# EAGLE board vaayu_2x8 (EAGLE 6.6.0)
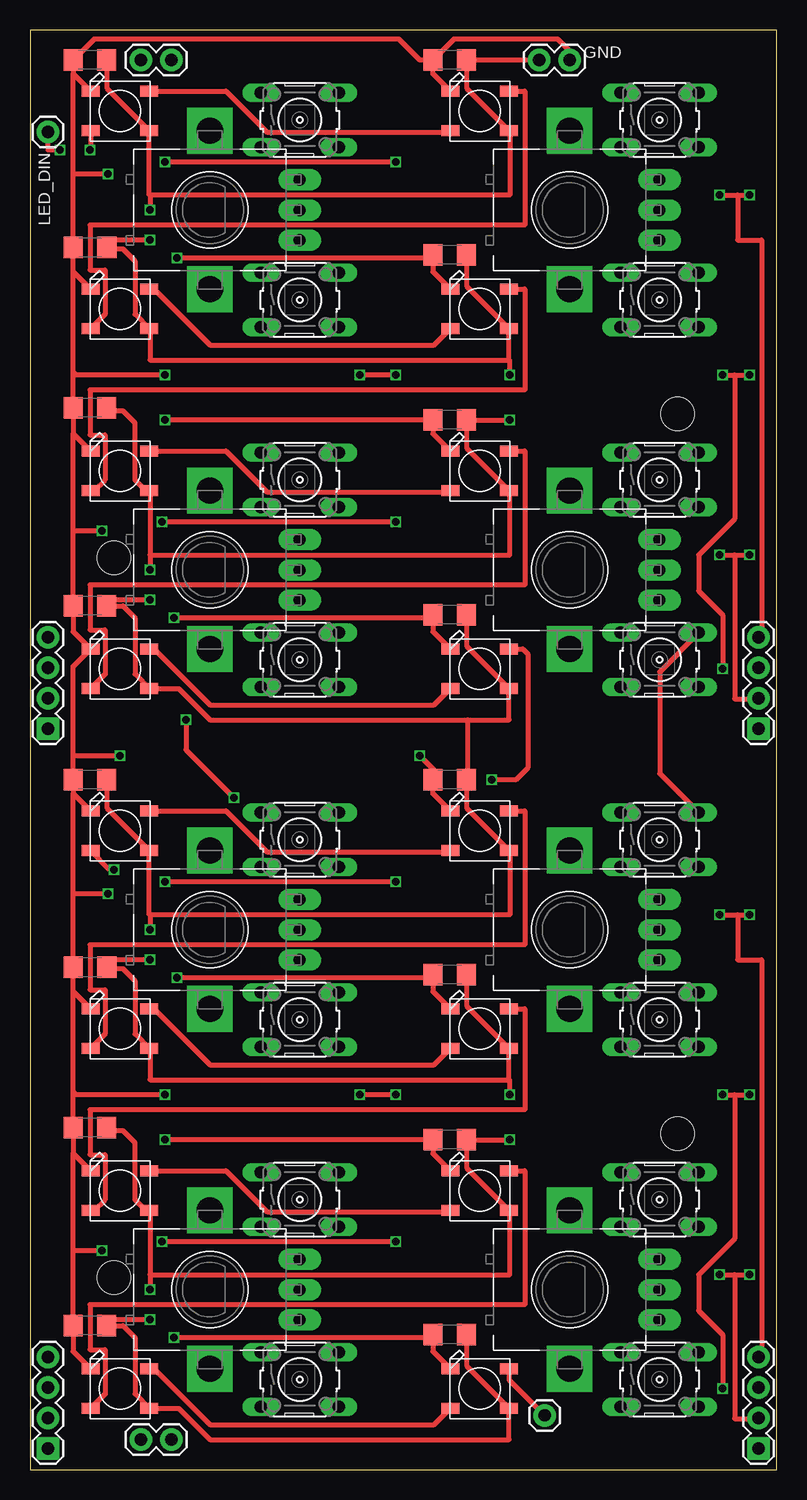
[diagram p0: board, top side]
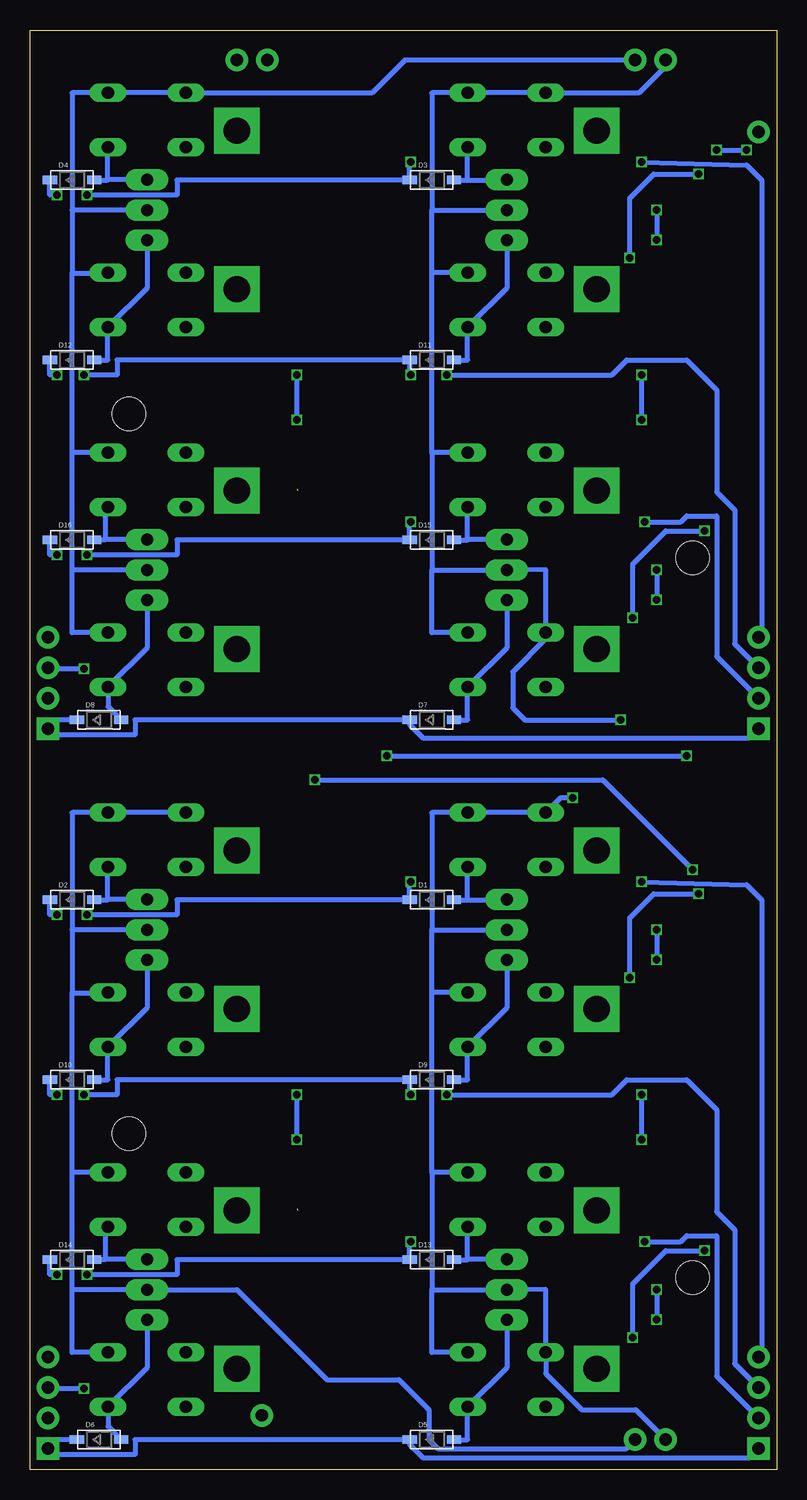
[diagram p1: board, bottom side, seen from below]

Size 62.25 x 120 mm. Coordinates in mm from the lower left corner, seen from the top.
Outline: 0,0 62.25,0 62.25,60 62.25,120 0,120 0,60 0,0
Copper layers (1*16): Top 0.035mm / dielectric 1.5mm / Bottom 0.035mm
Design rules "dirt_cheap_dirty_boards.v1": minimum track width 5mil, minimum drill 12mil, track to track 5mil, track to pad 5mil, pad to pad 5mil, via to via 5mil, smd to smd 0mil, copper to edge 10mil, drill to drill 10mil, minimum pad ring 10mil, minimum via ring 6mil, stop-mask expansion 2mil, vias tented up to drill 25mil, thermal gap 10mil
Holes 2.8 mm at 7,76 7,16 54,28 54,88

## Footprints (pad centres in the part's own frame; a part is rotated, then mirrored left to right if it is on the bottom)
C1206 = smd 1.6 x 1.8: 1 -1.4,0; 2 1.4,0
SOD-123 = smd 1.2 x 0.7: A 1.85,0; C -1.85,0
1X02 = drill 1.016 pad 1.88: 1 0,0; 2 2.54,0
1X04 = drill 1.016 pad 1.88 square: 1 0,0 | drill 1.016 pad 1.88: 2 2.54,0; 3 5.08,0; 4 7.62,0
1X01 = drill 1.016 pad 1.88: 1 0,0
WS2812B = smd 1.5 x 0.9: 1-VDD 2.45,-1.65; 2-DOUT 2.45,1.65; 3-GND -2.45,1.65; 4-DIN -2.45,-1.65
B3F-10XX = drill 1.016 long: 1 -3.251,2.261; 2 3.251,2.261; 3 -3.251,-2.261; 4 3.251,-2.261
TW-700198 = drill 2.2 pad 3.81 square: NC1 0,6.604; NC2 0,-6.604 | drill 1 pad 1.778 long: P1 7.493,2.54; P2 7.493,0; P3 7.493,-2.54

## Placement (x,y rotation side)
C1  [C1206]  35,41.25 180 top
C2  [C1206]  5.01,41.86 180 top
C3  [C1206]  5,117.5 180 top
C4  [C1206]  35,71.25 180 top
C5  [C1206]  5,12 180 top
C6  [C1206]  5,28.5 180 top
C7  [C1206]  35,101.25 180 top
C8  [C1206]  5.01,101.86 180 top
C9  [C1206]  5,57.5 180 top
C10  [C1206]  35,11.25 180 top
C11  [C1206]  5,72 180 top
C12  [C1206]  5,88.5 180 top
C13  [C1206]  35,27.5 180 top
C14  [C1206]  35,57.5 180 top
C15  [C1206]  35,87.5 180 top
C16  [C1206]  35,117.5 180 top
D1  [SOD-123]  28.75,47.5 0 bottom
D2  [SOD-123]  58.75,47.5 0 bottom
D3  [SOD-123]  28.75,107.5 0 bottom
D4  [SOD-123]  58.75,107.5 0 bottom
D5  [SOD-123]  28.75,2.5 0 bottom
D6  [SOD-123]  56.5,2.5 0 bottom
D7  [SOD-123]  28.75,62.5 0 bottom
D8  [SOD-123]  56.5,62.5 0 bottom
D9  [SOD-123]  28.75,32.5 0 bottom
D10  [SOD-123]  58.75,32.5 0 bottom
D11  [SOD-123]  28.75,92.5 0 bottom
D12  [SOD-123]  58.75,92.5 0 bottom
D13  [SOD-123]  28.75,17.5 0 bottom
D14  [SOD-123]  58.75,17.5 0 bottom
D15  [SOD-123]  28.75,77.5 0 bottom
D16  [SOD-123]  58.75,77.5 0 bottom
GND  M02PTH  [1X02]  45,117.5 180 top
JP2  [1X04]  1.5,1.75 90 top
JP3  [1X04]  60.75,1.75 90 top
JP4  M01PTH  [1X01]  42.91,4.51 0 top
JP5  [1X04]  1.5,61.75 90 top
JP6  M02PTH  [1X02]  9.25,2.5 0 top
JP7  M02PTH  [1X02]  9.25,117.5 0 top
JP9  [1X04]  60.75,61.75 90 top
L1  WS2812B  [WS2812B]  7.5,36.75 0 top
L2  WS2812B  [WS2812B]  37.5,36.75 0 top
L3  WS2812B  [WS2812B]  7.5,113.25 0 top
L4  WS2812B  [WS2812B]  37.5,113.25 0 top
L5  WS2812B  [WS2812B]  7.5,23.25 0 top
L6  WS2812B  [WS2812B]  37.5,23.25 0 top
L7  WS2812B  [WS2812B]  7.5,96.75 0 top
L8  WS2812B  [WS2812B]  37.5,96.75 0 top
L9  WS2812B  [WS2812B]  7.5,53.25 0 top
L10  WS2812B  [WS2812B]  37.5,53.25 0 top
L11  WS2812B  [WS2812B]  7.5,83.25 0 top
L12  WS2812B  [WS2812B]  37.5,83.25 0 top
L13  WS2812B  [WS2812B]  7.5,6.75 0 top
L14  WS2812B  [WS2812B]  37.5,6.75 0 top
L15  WS2812B  [WS2812B]  7.5,66.75 0 top
L16  WS2812B  [WS2812B]  37.5,66.75 0 top
LED_DIN  M01PTH  [1X01]  1.5,111.5 0 top
S1  [B3F-10XX]  22.5,52.5 0 top
S2  [B3F-10XX]  52.5,52.5 0 top
S3  [B3F-10XX]  22.5,112.5 0 top
S4  [B3F-10XX]  52.5,112.5 0 top
S5  [B3F-10XX]  22.5,37.5 0 top
S6  [B3F-10XX]  52.5,37.5 0 top
S7  [B3F-10XX]  22.5,97.5 0 top
S8  [B3F-10XX]  52.5,97.5 0 top
S9  [B3F-10XX]  22.5,7.5 0 top
S10  [B3F-10XX]  52.5,7.5 0 top
S11  [B3F-10XX]  22.5,67.5 0 top
S12  [B3F-10XX]  52.5,67.5 0 top
S13  [B3F-10XX]  22.5,22.5 0 top
S14  [B3F-10XX]  52.5,22.5 0 top
S15  [B3F-10XX]  22.5,82.5 0 top
S16  [B3F-10XX]  52.5,82.5 0 top
U$1  ALPHA-ROT-ENCODER  [TW-700198]  45,45 0 top
U$2  ALPHA-ROT-ENCODER  [TW-700198]  45,105 0 top
U$3  ALPHA-ROT-ENCODER  [TW-700198]  15,105 0 top
U$4  ALPHA-ROT-ENCODER  [TW-700198]  15,45 0 top
U$5  ALPHA-ROT-ENCODER  [TW-700198]  45,15 0 top
U$6  ALPHA-ROT-ENCODER  [TW-700198]  45,75 0 top
U$7  ALPHA-ROT-ENCODER  [TW-700198]  15,75 0 top
U$8  ALPHA-ROT-ENCODER  [TW-700198]  15,15 0 top

## Library data of the parts
C1-C16 = resistor
D1-D16 L1-L16 = adafruit
GND JP2-JP7 JP9 LED_DIN = SparkFun-Connectors
S1-S16 = switch-omron; MPN: B3F-1000; OC_FARNELL: 176432; OC_NEWARK: 36M3542
U$1-U$8 = RotaryEncoder

## Nets
COL1: JP6.1 JP7.1 S1.1 S1.2 S3.1 S3.2 S5.2 S7.2 S9.1 S9.2 S11.1 S11.2 S13.2 S15.2 U$3.P2 U$4.P2 U$7.P2 U$8.P2
COL2: JP6.2 JP7.2 S2.1 S2.2 S4.1 S4.2 S6.2 S8.2 S10.2 S12.2 S14.2 S16.2 U$1.P2 U$2.P2 U$5.P2 U$6.P2
D1: D4.A S4.4 U$2.P1
D2: D7.A S11.4 U$7.P3
D3: D8.A S12.4 U$6.P3
D4: D11.A S7.4 U$3.P3
D5: D12.A S8.4 U$2.P3
D6: D15.A S15.4 U$7.P1
D7: D16.A S16.4 U$6.P1
D8: D3.A S3.4 U$3.P1
D11: D1.A S1.4 U$4.P1
D12: D9.A S5.4 U$4.P3
D13: D5.A S9.4 U$8.P3
D14: D13.A S13.4 U$8.P1
D21: D2.A S2.4 U$1.P1
D22: D10.A S6.4 U$1.P3
D23: D6.A S10.4 U$5.P3
D24: D14.A S14.4 U$5.P1
GND: C1.2 C2.2 C3.2 C4.2 C5.2 C6.2 C7.2 C8.2 C9.2 C10.2 C11.2 C12.2 C13.2 C14.2 C15.2 C16.2 GND.1 L1.3-GND L2.3-GND L3.3-GND L4.3-GND L5.3-GND L6.3-GND L7.3-GND L8.3-GND L9.3-GND L10.3-GND L11.3-GND L12.3-GND L13.3-GND L14.3-GND L15.3-GND L16.3-GND
LED_DIN1: L3.4-DIN LED_DIN.1
N$1: L1.2-DOUT L2.4-DIN
N$2: L3.2-DOUT L4.4-DIN
N$3: L4.2-DOUT L7.4-DIN
N$4: L2.2-DOUT L5.4-DIN
N$5: L5.2-DOUT L6.4-DIN
N$6: L6.2-DOUT L13.4-DIN
N$7: L7.2-DOUT L8.4-DIN
N$8: L8.2-DOUT L11.4-DIN
N$9: L13.2-DOUT L14.4-DIN
N$10: JP4.1 L14.2-DOUT
N$11: L11.2-DOUT L12.4-DIN
N$12: L12.2-DOUT L15.4-DIN
N$13: L15.2-DOUT L16.4-DIN
N$14: L9.4-DIN L16.2-DOUT
N$23: L9.2-DOUT L10.4-DIN
N$24: L1.4-DIN L10.2-DOUT
ROW1: D1.C D2.C JP2.4 JP3.4
ROW2: D9.C D10.C JP2.3 JP3.3
ROW3: D13.C D14.C JP2.2 JP3.2
ROW4: D5.C D6.C JP2.1 JP3.1
ROW5: D3.C D4.C JP5.4 JP9.4
ROW6: D15.C D16.C JP5.2 JP9.2
ROW7: D11.C D12.C JP5.3 JP9.3
ROW8: D7.C D8.C JP5.1 JP9.1
VCC: C1.1 C2.1 C3.1 C4.1 C5.1 C6.1 C7.1 C8.1 C9.1 C10.1 C11.1 C12.1 C13.1 C14.1 C15.1 C16.1 GND.2 L1.1-VDD L2.1-VDD L3.1-VDD L4.1-VDD L5.1-VDD L6.1-VDD L7.1-VDD L8.1-VDD L9.1-VDD L10.1-VDD L11.1-VDD L12.1-VDD L13.1-VDD L14.1-VDD L15.1-VDD L16.1-VDD

## Tracks (layer width: path | path; a pad name or v marks a point on that pad's centre or on a via)
COL1  (via drill 0.6)
  Top 0.406: v13,62.5 13,60 v17,56
  Bottom 0.406: 28.75,45 28.75,54.76 S1.2 S1.1 18.01,56 v17,56 | 28.75,45 U$4.P2 | S5.2 28.75,39.76 | 28.75,39.76 28.75,45 | 28.75,24.76 28.75,15 | 28.75,15 U$8.P2 19.25,15.01 S9.1 19.25,8 16.25,5 11.75,5 JP6.1 | S9.2 28.75,9.76 28.75,15 | S13.2 28.75,24.76 | 28.75,24.76 28.75,39.76 | 28.75,105 28.75,114.76 S3.2 S3.1 19.24,114.75 11.5,114.75 9.25,117 JP7.1 | 28.75,105 U$3.P2 | S7.2 28.75,99.76 | 28.75,99.76 28.75,105 | 28.75,84.76 28.75,75 | 28.75,75 U$7.P2 19.25,75.01 S11.1 19.25,69.25 22,66.5 22,63.5 21,62.5 v13,62.5 | S11.2 28.75,69.76 28.75,75 | S15.2 28.75,84.76 | 28.75,84.76 28.75,99.76
COL2
  Top 0.406: S12.2 52.5,66.5 52.5,58.01 S2.2
  Bottom 0.406: 58.75,45 58.75,54.76 S2.2 S2.1 | 58.75,45 58.75,39.75 | 58.75,39.75 S6.2 | U$1.P2 58.75,45 | S14.2 58.75,24.76 | 58.75,24.76 58.75,39.75 | 58.75,15 U$5.P2 45,15 37.5,7.5 31.5,7.5 29,5 29,2.5 28.25,1.75 12.54,1.75 JP6.2 | 58.75,15 58.75,24.76 | S10.2 58.75,9.76 58.75,15 | 58.75,105 58.75,114.76 S4.2 S4.1 49.24,114.75 33.75,114.75 31,117.5 JP7.2 | 58.75,105 58.75,99.75 | 58.75,99.75 S8.2 | U$2.P2 58.75,105 | S16.2 58.75,84.76 | 58.75,84.76 58.75,99.75 | U$6.P2 58.75,75 | 58.75,75 58.75,84.76 | S12.2 58.75,69.76 58.75,75
D1
  Bottom 0.406: D4.A 55.75,107.5 55.75,107.54 | 55.75,107.54 S4.4 | U$2.P1 55.75,107.54
D2
  Bottom 0.406: D7.A 25.75,62.5 S11.4 22.49,68.5 U$7.P3
D3
  Bottom 0.406: U$6.P3 52.49,68.5 S12.4 55.75,63.6 D8.A
D4
  Bottom 0.406: D11.A 25.75,92.5 S7.4 22.49,98.5 U$3.P3
D5
  Bottom 0.406: D12.A 55.75,92.5 S8.4 52.49,98.5 U$2.P3
D6
  Bottom 0.406: U$7.P1 25.75,77.54 | 25.75,77.54 S15.4 | D15.A 25.75,77.5 25.75,77.54
D7
  Bottom 0.406: S16.4 56,80.24 56,77.54 | D16.A 56,77.5 56,77.54 | U$6.P1 56,77.54
D8
  Bottom 0.406: D3.A 25.75,107.5 | 25.75,107.5 S3.4 | 25.75,107.5 22.53,107.5 U$3.P1
D11
  Bottom 0.406: D1.A 25.75,47.5 | 25.75,47.5 S1.4 | 25.75,47.5 22.53,47.5 U$4.P1
D12
  Bottom 0.406: D9.A 25.75,32.5 S5.4 22.49,38.5 U$4.P3
D13
  Bottom 0.406: D5.A 25.75,2.5 S9.4 22.49,8.5 U$8.P3
D14
  Bottom 0.406: U$8.P1 25.75,17.54 | 25.75,17.54 S13.4 | D13.A 25.75,17.5 25.75,17.54
D21
  Bottom 0.406: D2.A 55.75,47.5 55.75,47.54 | 55.75,47.54 S2.4 | U$1.P1 55.75,47.54
D22
  Bottom 0.406: D10.A 55.75,32.5 S6.4 52.49,38.5 U$1.P3
D23
  Bottom 0.406: U$5.P3 52.49,8.5 S10.4 55.75,3.6 D6.A
D24
  Bottom 0.406: S14.4 56,20.24 56,17.54 | D14.A 56,17.5 56,17.54 | U$5.P1 56,17.54
GND  (via drill 0.6)
  Top 0.406: 33.6,57.35 C14.2 33.75,57.5 | 3.6,39.85 L1.3-GND | L2.3-GND 33.6,39.85 C1.2 33.6,41.1 33.5,41 v12.25,41 | 3.6,56.35 C9.2 3.6,59.5 | 3.6,56.35 L9.3-GND | L10.3-GND 33.6,56.35 33.6,57.35 | 3.6,39.85 3.6,41.84 C2.2 3.6,48 | 3.6,26.35 C6.2 3.6,31.5 | 3.6,26.35 L5.3-GND | L6.3-GND 33.6,26.35 C13.2 v11.25,27.5 | L13.3-GND 3.6,9.85 C5.2 3.6,18.25 | L14.3-GND 33.6,9.85 C10.2 33.6,11.1 33.5,11 v12,11 | 33.6,57.35 33.75,57.5 | 3.6,18.25 3.6,26.35 | 3.6,31.5 3.6,39.85 | 3.6,48 3.6,56.35 | v11.25,31.25 3.85,31.25 3.6,31.5 | v6,18.25 3.6,18.25 | v6.5,48 3.6,48 | C16.2 33.6,117.35 | 3.6,99.85 L7.3-GND | L8.3-GND 33.6,99.85 C7.2 33.6,101.1 33.5,101 v12.25,101 | 3.6,116.35 C3.2 5.35,119.25 30.75,119.25 32.5,117.5 C16.2 | 3.6,116.35 L3.3-GND | L4.3-GND 33.6,116.35 33.6,117.35 | 3.6,99.85 3.6,101.84 C8.2 3.6,108 | 3.6,86.35 C12.2 3.6,91.5 | 3.6,86.35 L11.3-GND | L12.3-GND 33.6,86.35 C15.2 v11.25,87.5 | L16.3-GND 33.6,69.85 C4.2 33.6,71.1 33.5,71 v12,71 | 33.6,117.35 33.75,117.5 C16.2 | 3.6,78.25 C11.2 3.6,69.85 L15.3-GND 3.6,66.95 3.6,59.5 | 3.6,78.25 3.6,86.35 | 3.6,91.5 3.6,99.85 | 3.6,108 3.6,116.35 | v11.25,91.25 3.85,91.25 3.6,91.5 | v6,78.25 3.6,78.25 | v6.5,108 3.6,108 | GND.1 45,118.25 44,119.25 35.35,119.25 C16.2 | 33.75,57.5 33.75,58.25 v32.5,59.5 | v7.5,59.5 3.6,59.5
  Bottom 0.406: v11.25,27.5 v11.25,31.25 | v12,11 12,15.5 9.25,18.25 v6,18.25 | v12.25,41 12.25,46 10.25,48 v6.5,48 | v11.25,87.5 v11.25,91.25 | v12,71 12,75.5 9.25,78.25 v6,78.25 | v12.25,101 12.25,106 10.25,108 v6.5,108 | v32.5,59.5 v7.5,59.5
LED_DIN1  (via drill 0.6)
  Top 0.406: L3.4-DIN 5.05,110.05 v5,110 | v2.5,110 1.5,110 LED_DIN.1
  Bottom 0.406: v5,110 v2.5,110
N$1
  Top 0.406: L1.2-DOUT 10.35,38.4 15,33.75 33.7,33.75 L2.4-DIN
N$2
  Top 0.406: L3.2-DOUT 16.35,114.9 19.75,111.5 34.95,111.5 L4.4-DIN
N$3
  Top 0.406: L4.2-DOUT 41.25,114.9 41.25,103.75 5,103.75 5,100 6.25,100 6.25,96.3 L7.4-DIN
N$4
  Top 0.406: L2.2-DOUT 41.25,38.4 41.25,30 5,30 5,26.25 6.25,26.25 6.25,22.5 5.35,21.6 L5.4-DIN
N$5
  Top 0.406: L5.2-DOUT 16.35,24.9 19.75,21.5 34.95,21.5 L6.4-DIN
N$6
  Top 0.406: L6.2-DOUT 41.25,24.9 41.25,13.75 5,13.75 5,10 6.25,10 6.25,6.25 6.2,6.25 L13.4-DIN
N$7
  Top 0.406: L7.2-DOUT 10.35,98.4 15,93.75 33.7,93.75 L8.4-DIN
N$8
  Top 0.406: L8.2-DOUT 41.25,98.4 41.25,90 5,90 5,86.25 6.25,86.25 6.25,82.5 5.35,81.6 L11.4-DIN
N$9
  Top 0.406: L13.2-DOUT 10.35,8.4 15,3.75 33.7,3.75 L14.4-DIN
N$10
  Top 0.406: L14.2-DOUT 39.95,7.47 JP4.1
N$11
  Top 0.406: L11.2-DOUT 16.35,84.9 19.75,81.5 34.95,81.5 L12.4-DIN
N$12
  Top 0.406: L12.2-DOUT 41.25,84.9 41.25,73.75 5,73.75 5,70 6.25,70 6.25,66.25 6.2,66.25 L15.4-DIN
N$13
  Top 0.406: L15.2-DOUT 10.35,68.4 15,63.75 33.7,63.75 L16.4-DIN
N$14  (via drill 0.6)
  Top 0.406: L16.2-DOUT 41.1,68.4 41.5,68 41.5,58.5 40.5,57.5 v38.5,57.5 | v7,50 6.65,50 L9.4-DIN
  Bottom 0.406: v38.5,57.5 14.5,57.5 v7,50
N$23
  Top 0.406: L9.2-DOUT 16.35,54.9 19.75,51.5 34.95,51.5 L10.4-DIN
N$24
  Top 0.406: L10.2-DOUT 41.25,54.9 41.25,43.75 5,43.75 5,40 6.25,40 6.25,36.3 L1.4-DIN
ROW1  (via drill 0.6)
  Top 0.406: v57.5,46.25 59,46.25 | 59,46.25 v60,46.25 | 59,46.25 59,42.5 61,42.5 61,9.62 JP3.4 | v30.5,49 v11.25,49
  Bottom 0.406: v57.5,46.25 50,46.25 50,47.5 D1.C 30.6,48.65 v30.5,49 | v60,46.25 60.6,46.25 D2.C | v11.25,49 2.5,48.75 1.25,47.5 1.25,9.62 JP2.4
ROW2  (via drill 0.6)
  Top 0.406: v57.75,31.25 58.75,31.25 | 58.75,31.25 v60,31.25 | 58.75,31.25 58.75,19.25 55.75,16.25 55.75,13.25 57.75,11.25 v57.75,6.75 | v30.5,31.25 v27.5,31.25
  Bottom 0.406: D10.C 60.6,31.25 v60,31.25 | v57.75,31.25 55,31.25 55,32.5 D9.C 30.6,31.35 v30.5,31.25 | v57.75,6.75 60.67,6.75 JP3.3 | v27.5,31.25 13.75,31.25 12.5,32.5 7.5,32.5 5,30 5,21.5 3.5,20 3.5,8.83 JP2.3
ROW3  (via drill 0.6)
  Top 0.406: v57.5,16.25 58.75,16.25 | 58.75,16.25 v60,16.25 | 58.75,16.25 58.75,4.25 60.71,4.25 JP3.2 | v30.5,19 v11,19
  Bottom 0.406: v57.5,16.25 50,16.25 50,17.5 D13.C 30.6,18.9 v30.5,19 | v60,16.25 60.6,16.25 D14.C | v11,19 8,19 7.5,19.5 5,19.5 5,7.79 JP2.2
ROW4
  Bottom 0.406: D6.C 60,2.5 JP3.1 60.75,1.25 53.5,1.25 53.5,2.5 D5.C 30.6,2.1 29.5,1 2.25,1 JP2.1
ROW5  (via drill 0.6)
  Top 0.406: v57.5,106.25 59,106.25 | 59,106.25 v60,106.25 | 59,106.25 59,102.5 61,102.5 61,69.62 JP9.4 | v30.5,109 v11.25,109
  Bottom 0.406: v57.5,106.25 50,106.25 50,107.5 D3.C 30.6,108.65 v30.5,109 | v60,106.25 60.6,106.25 D4.C | v11.25,109 2.5,108.75 1.25,107.5 1.25,69.62 JP5.4
ROW6  (via drill 0.6)
  Top 0.406: v57.5,76.25 58.75,76.25 | 58.75,76.25 v60,76.25 | 58.75,76.25 58.75,64.25 60.71,64.25 JP9.2 | v30.5,79 v11,79
  Bottom 0.406: v57.5,76.25 50,76.25 50,77.5 D15.C 30.6,78.9 v30.5,79 | v60,76.25 60.6,76.25 D16.C | v11,79 8,79 7.5,79.5 5,79.5 5,67.79 JP5.2
ROW7  (via drill 0.6)
  Top 0.406: v57.75,91.25 58.75,91.25 | 58.75,91.25 v60,91.25 | 58.75,91.25 58.75,79.25 55.75,76.25 55.75,73.25 57.75,71.25 v57.75,66.75 | v30.5,91.25 v27.5,91.25
  Bottom 0.406: D12.C 60.6,91.25 v60,91.25 | v57.75,91.25 55,91.25 55,92.5 D11.C 30.6,91.35 v30.5,91.25 | v57.75,66.75 60.67,66.75 JP9.3 | v27.5,91.25 13.75,91.25 12.5,92.5 7.5,92.5 5,90 5,81.5 3.5,80 3.5,68.83 JP5.3
ROW8
  Bottom 0.406: D8.C 60,62.5 JP9.1 60.75,61.25 53.5,61.25 53.5,62.5 D7.C 30.6,62.1 29.5,61 2.25,61 JP5.1
VCC  (via drill 0.6)  (2 unrouted)
  Top 0.406: C9.1 6.4,55.15 L9.1-VDD 9.95,46.25 10,46.25 | 10,46.25 40,46.25 40,51.6 L10.1-VDD 36.4,55.15 C14.1 36.5,57.5 36.5,62.5 | C1.1 36.4,38.65 L2.1-VDD 39.95,32.5 | 39.95,32.5 10,32.5 10,35.1 L1.1-VDD 8.75,36.3 8.75,40.75 7.75,41.75 6.53,41.75 C2.1 6.42,42.5 v10,42.5 | L6.1-VDD 36.4,25.15 C13.1 v40,27.5 | C10.1 36.4,8.65 L14.1-VDD 39.95,2.5 15,2.5 12.4,5.1 L13.1-VDD 8.75,6.3 8.75,11 7.75,12 C5.1 6.4,12.5 v10,12.5 | v40,31.25 40,32.45 39.95,32.5 | 6.65,28.75 C6.1 6.65,28.25 7.75,28.25 8.75,27.25 8.75,22.5 9.65,21.6 L5.1-VDD 10,21.6 10,16.25 | 10,16.25 40,16.25 40,21.75 | 10,46.25 v10,45 | 10,16.25 v10,15 | C3.1 6.4,115.15 L3.1-VDD 9.95,106.25 10,106.25 | 10,106.25 40,106.25 40,111.6 L4.1-VDD 36.4,115.15 C16.1 GND.2 | C7.1 36.4,98.65 L8.1-VDD 39.95,92.5 | 39.95,92.5 10,92.5 10,95.1 L7.1-VDD 8.75,96.3 8.75,100.75 7.75,101.75 6.53,101.75 C8.1 6.42,102.5 v10,102.5 | L12.1-VDD 36.4,85.15 C15.1 v40,87.5 | C4.1 36.4,68.65 L16.1-VDD 39.95,62.5 36.5,62.5 | v40,91.25 40,92.45 39.95,92.5 | 6.65,88.75 C12.1 6.65,88.25 7.75,88.25 8.75,87.25 8.75,82.5 9.65,81.6 L11.1-VDD 10,81.6 10,76.25 | 10,76.25 40,76.25 40,81.75 | 10,106.25 v10,105 | 10,76.25 v10,75 | v10,72.5 6.4,72.5 C11.1 7.75,72 8.75,71 8.75,66.3 L15.1-VDD 12.4,65.1 15,62.5 36.5,62.5
  Bottom 0.406: v40,27.5 v40,31.25 | v10,45 v10,42.5 | v10,15 v10,12.5 | v40,87.5 v40,91.25 | v10,105 v10,102.5 | v10,75 v10,72.5